# Altium PCB 盲文32.pcbdoc
Units mil, origin at the board's own origin, x right, y up, seen from the top; angles counter-clockwise.
Board outline 2210.03 x 1825.03 mil, 2 copper layers (Top Layer, Bottom Layer); 76 components, 76 nets, 285 pads, 45 vias.
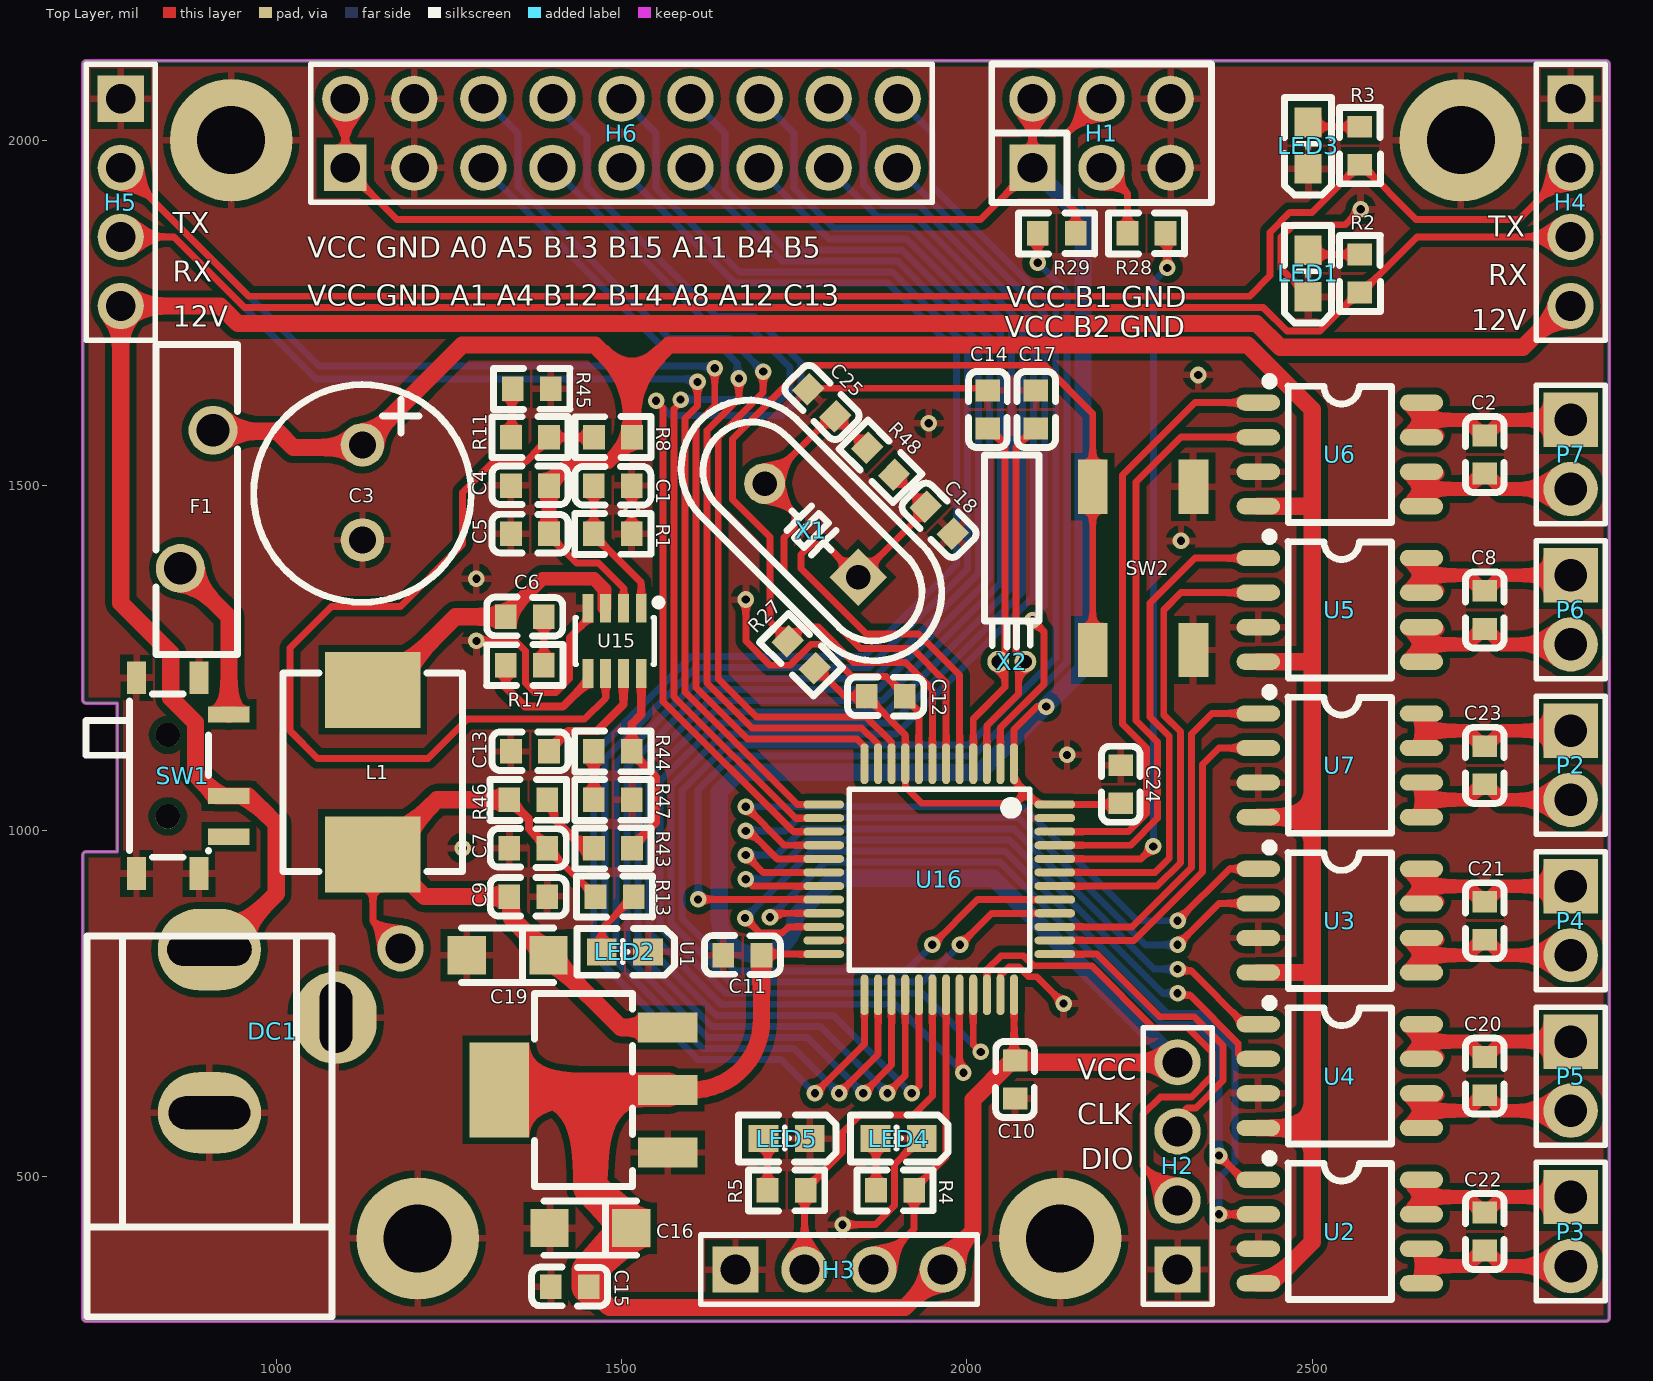
[diagram p0: Top Layer view]
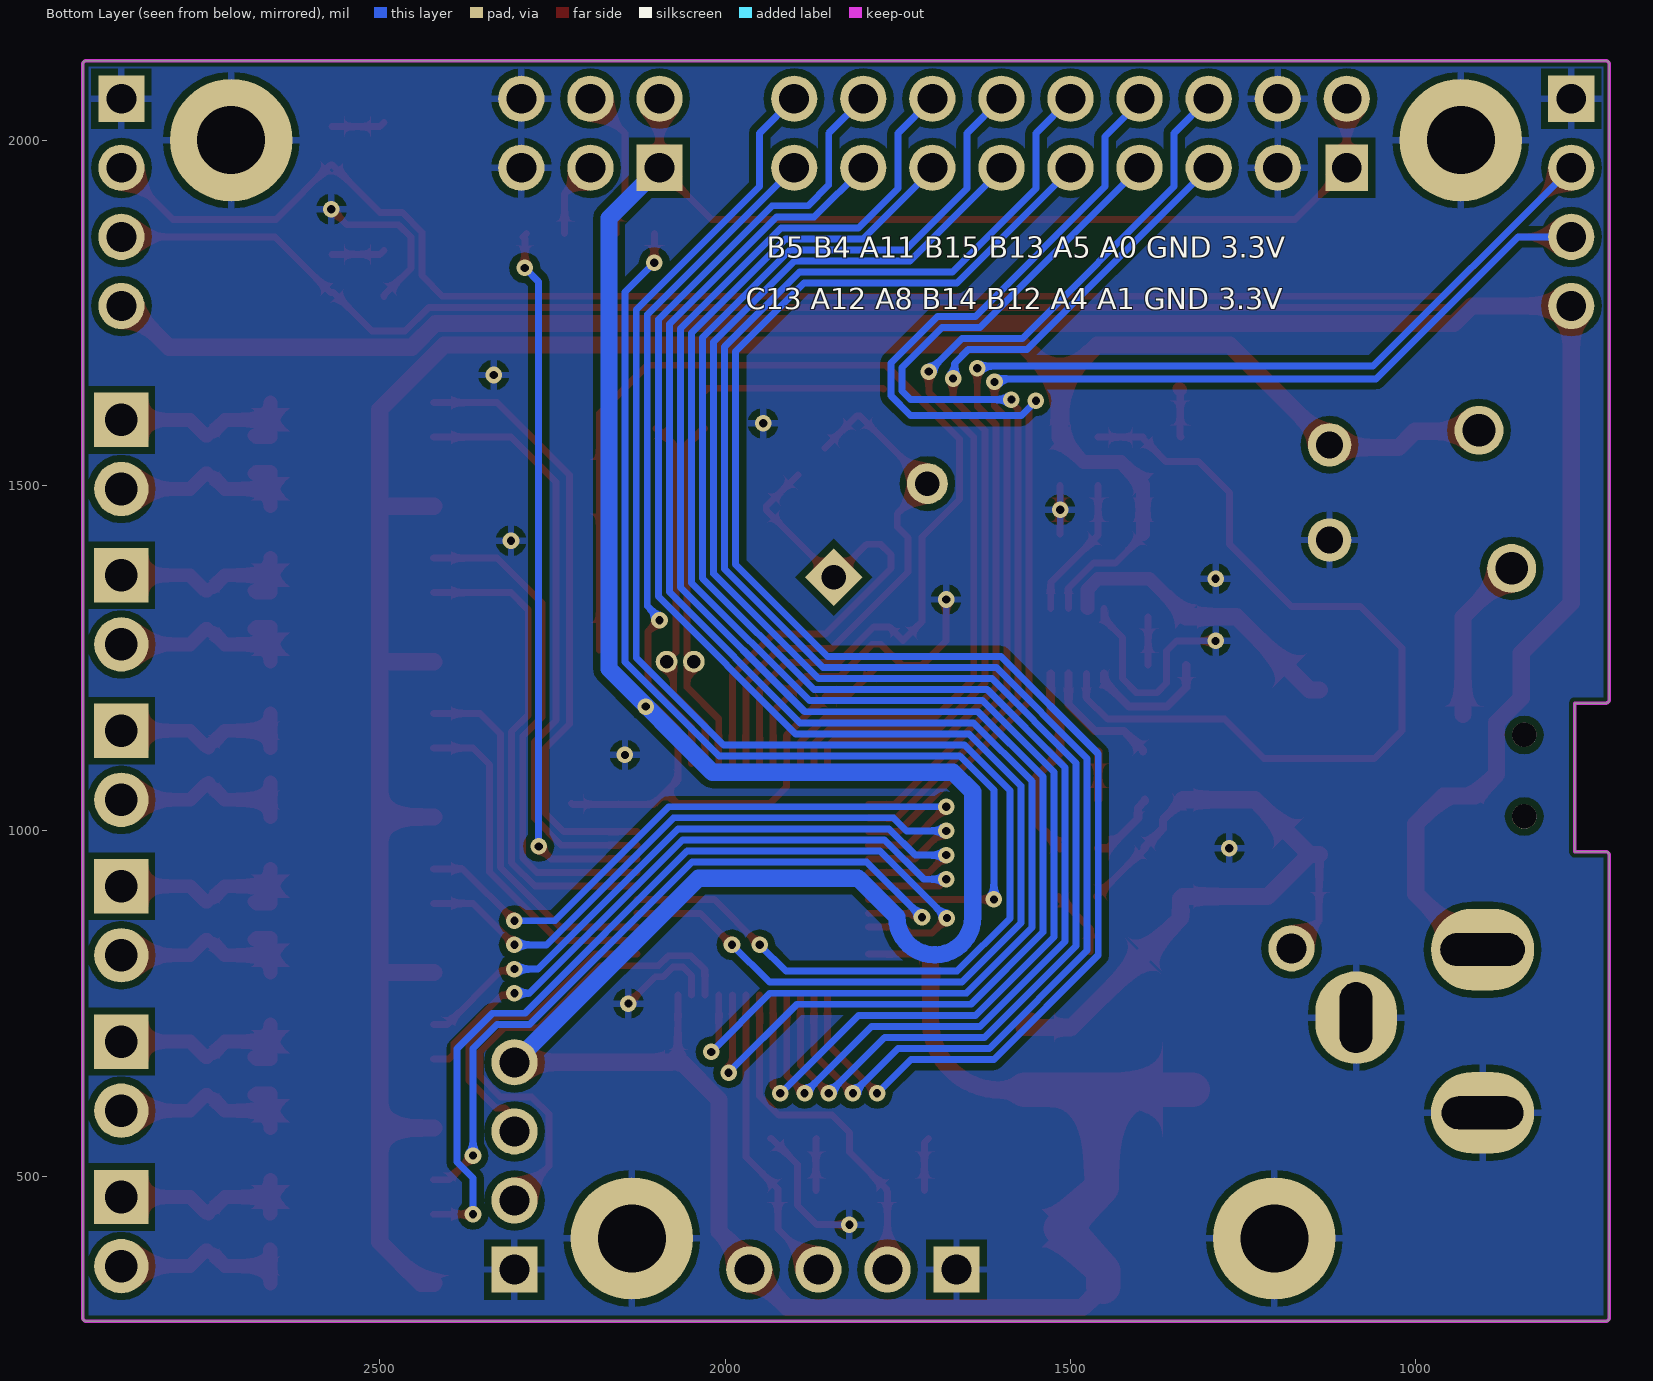
[diagram p1: Bottom Layer view, seen from below]

## Layer stack, top to bottom
Top Solder: solder mask 0.4, Solder Resist, Dk 3.5
Top Layer: signal copper 1.4
Dielectric1: dielectric 12.6, FR-4, Dk 4.8
Bottom Layer: signal copper 1.4
Bottom Solder: solder mask 0.4, Solder Resist, Dk 3.5

## Board outline
719.99,295 719.99,964.97 cw(c725,965) 725,970.01 769.99,970.01 769.99,1184.98 725,1184.98 ccw(c725,1190) 725,1184.98 ccw(c725,1190) 725,1184.98 cw(c725,1190) 719.98,1190 719.98,2110 cw(c725,2110) 725,2115.01 2925,2115.01 cw(c2925,2110) 2930.01,2110 2930.01,295 cw(c2925,295) 2925,289.99 725,289.99 cw(c725,295)

## Design rules (kind name [scope] priority, off if disabled: settings)
Clearance keepoutlayer [(InLayerClass('Signal Layers')) vs OnLayer('Keep-Out Layer')] p1: gap=6 ignorepadtopadclearanceinfootprint=FALSE
Clearance polygon [All vs InPolygon] p2: gap=10 ignorepadtopadclearanceinfootprint=FALSE
Clearance [All] p3: gap=6 ignorepadtopadclearanceinfootprint=FALSE except(0: Arc-Text Arc-Hole Track-Text Track-Hole SMDPad-Text SMDPad-Hole THPad-Text THPad-Hole Via-Text Via-Hole Fill-Text Fill-Hole Poly-Text Poly-Hole Region-Text Region-Hole Text-Text Text-Hole)
ComponentClearance [All] p1 off: gap=10 collisioncheckmode=3 verticalgap=10 showdistances=FALSE
DiffPairsRouting DiffPair_DiffPairsRouting [All] p1: maxlimit=10 minlimit=10 mostfreqgap=10 toplayer_minwidth=15 toplayer_maxwidth=15 toplayer_prefwidth=15 bottomlayer_minwidth=15 bottomlayer_maxwidth=15 bottomlayer_prefwidth=15 maxuncoupledlength=500
DiffPairsRouting [All] p2: maxlimit=10 minlimit=10 mostfreqgap=10 toplayer_minwidth=15 toplayer_maxwidth=15 toplayer_prefwidth=15 bottomlayer_minwidth=15 bottomlayer_maxwidth=15 bottomlayer_prefwidth=15 maxuncoupledlength=500
HoleSize [All] p1: absolutevalues=TRUE maxlimit=99999 minlimit=11.81 maxpercent=80.000 minpercent=20.000
HoleToHoleClearance [All] p1: gap=0 allowstackedmicrovias=TRUE
MinimumSolderMaskSliver [All] p1 off: minsoldermaskwidth=6
PolygonConnect [All] p1: connectstyle=Relief reliefconductorwidth=10 reliefentries=4 polygonreliefangle="90 Angle" airgapwidth=10
RoutingVias [All] p1: holewidth=12 width=24 viastyle="Through Hole" minholewidth=12 minwidth=24 maxholewidth=24 maxwidth=32
SilkToSilkClearance [All] p1: silktosilkclearance=0
SilkToSolderMaskClearance [IsPad] p1: minsilkscreentomaskgap=0 clearancetoexposedcopper=TRUE
SolderMaskExpansion [All] p1: expansion=4
Width gnd [InNet('GND')] p1: maxlimit=50 minlimit=10 preferedwidth=30
Width vcc [InNet('VCC')] p2: maxlimit=50 minlimit=10 preferedwidth=20
Width [All] p3: maxlimit=50 minlimit=6 preferedwidth=10
23 further rules are at their usual default settings.

## Components (designator, comment, footprint, x,y, rotation, side; value= is the part's Value field where it differs from the comment)
C1 "1nF" C0603 1487.44,1500 r180 top
C2 "100nF" C0603 2750,1545 r90 top
C3 "220uF" CAP-TH_BD8.0-P3.50-D1.0-FD 1125,1490 r270 top
C4 "4.7uF" C0603 1367.44,1500 r0 top
C5 "100nF" C0603 1367.44,1430 r0 top
C6 "100nF" C0603 1360,1310 r0 top
C7 "22uF" C0603 1365,975 r0 top
C8 "100nF" C0603 2750,1320 r90 top
C9 "100nF" C0603 1365,905 r180 top
C10 "100nF" C0603 2070,640 r90 top
C11 "100nF" C0603 1675,820 r0 top
C12 "100nF" C0603 1882.44,1195 r180 top
C13 "100nF" C0603 1367.44,1115 r0 top
C14 "10pF" C0603 2030,1610 r270 top
C15 "100nF" C0603 1425,340 r0 top
C16 "10uF" CAP-SMD_L3.2-W1.6-R-RD 1455,425 r0 top
C17 "10pF" C0603 2100,1610 r270 top
C18 "22pF" C0603 1960,1450 r135 top
C19 "10uF" CAP-SMD_L3.2-W1.6-R-RD 1335,820 r0 top
C20 "100nF" C0603 2750,645 r90 top
C21 "100nF" C0603 2750,870 r90 top
C22 "100nF" C0603 2750,420 r90 top
C23 "100nF" C0603 2750,1095 r90 top
C24 "100nF" C0603 2222.44,1067.56 r270 top
C25 "22pF" C0603 1790,1620 r315 top
DC1 "DC-5.5*2.1" DC5.5*2.1MM 995,710 r180 top
F1 "A30-300" FUSE-TH_11.4-W3.0-P5.10-D0.8-S1.20 885,1480 r90 top
H1 "2271729-6" HDR-TH_6P-P2.54-V-M-R2-C3-S2.54 2195,2010 r0 top
H2 "Header-Male-2.54_1x4" HDR-TH_4P-P2.54-V 2305,515 r90 top
H3 "Header-Male-2.54_1x4" HDR-TH_4P-P2.54-V 1815,365 r0 top
H4 "Header-Male-2.54_1x4" HDR-TH_4P-P2.54-V 2874.02,1910 r270 top
H5 "Header-Male-2.54_1x4" HDR-TH_4P-P2.54-V 775,1910 r270 top
H6 "Header-Female-2.54_2x9" HDR-TH_18P-P2.54-V-R2-C9-S2.54 1500,2010 r0 top
L1 "10uH" IND-SMD_L7.3-W6.6_MHCI06030 1140,1085 r90 top
LED1 "19-217/GHC-YR1S2/3T" LED0603-R-RD 2494,1807 r90 top
LED2 "19-217/GHC-YR1S2/3T" LED0603-R-RD 1505,825 r180 top
LED3 "19-217/GHC-YR1S2/3T" LED0603-R-RD 2494,1992 r90 top
LED4 "19-217/GHC-YR1S2/3T" LED0603-R-RD 1901.1,554.69 r180 top
LED5 "19-217/GHC-YR1S2/3T" LED0603-R-RD 1739.1,554.69 r180 top
P2 "Header" HDR-TH_2P-P2.54-V-M 2874.02,1095 r270 top
P3 "Header" HDR-TH_2P-P2.54-V-M 2874.02,420 r270 top
P4 "Header" HDR-TH_2P-P2.54-V-M 2874.02,870 r270 top
P5 "Header" HDR-TH_2P-P2.54-V-M 2874.02,645 r270 top
P6 "Header" HDR-TH_2P-P2.54-V-M 2874.02,1320 r270 top
P7 "Header" HDR-TH_2P-P2.54-V-M 2874.02,1545 r270 top
R1 "47K" R0603 1487.44,1430 r180 top
R2 "3.6K" R0603 2569,1807 r90 top
R3 "3.6K" R0603 2569,1992 r90 top
R4 "3.6K" R0603 1896.1,479.69 r180 top
R5 "3.6K" R0603 1739.1,479.69 r180 top
R8 "100K" R0603 1487.56,1570 r0 top
R11 "20K" R0603 1367.56,1570 r0 top
R13 "3.6K" R0603 1490,905 r0 top
R17 "20" R0603 1360,1240 r0 top
R27 "10K" R0603 1760,1255 r135 top
R28 "10K" R0603 2260,1865 r0 top
R29 "10K" R0603 2130,1865 r0 top
R43 "220K" R0603 1487.56,975 r180 top
R44 "43K" R0603 1487.44,1115 r0 top
R45 "1K" R0603 1370,1640 r180 top
R46 "12K" R0603 1365,1045 r180 top
R47 "1.2K" R0603 1487.44,1045 r180 top
R48 "1M" R0603 1875,1535 r135 top
SW1 "MSK12C02" SW-TH_MSK12C02 864.76,1080 r270 top
SW2 "SKQGADE010" SW-SMD_4P-L5.2-W5.2-P3.70-LS6.4 2255,1380 r90 top
U1 "AMS1117-3.3" SOT-223-3_L6.5-W3.4-P2.30-LS7.0-BR 1445,625 r0 top
U2 "RZ7889" SOP-8_L4.9-W3.9-P1.27-LS6.0-BL 2540,420 r270 top
U3 "RZ7889" SOP-8_L4.9-W3.9-P1.27-LS6.0-BL 2540,870 r270 top
U4 "RZ7889" SOP-8_L4.9-W3.9-P1.27-LS6.0-BL 2540,645 r270 top
U5 "RZ7889" SOP-8_L4.9-W3.9-P1.27-LS6.0-BL 2540,1320 r270 top
U6 "RZ7889" SOP-8_L4.9-W3.9-P1.27-LS6.0-BL 2540,1545 r270 top
U7 "RZ7889" SOP-8_L4.9-W3.9-P1.27-LS6.0-BL 2540,1095 r270 top
U15 "MP2135" SOT-23-8_L3.0-W1.7-P0.65-LS2.8-BL 1490,1275 r180 top
U16 "STM32F103C8T6" LQFP-48_L7.0-W7.0-P0.50-LS9.0-BL 1960,930 r180 top
X1 "8MHz" HC-49US_L11.5-W4.5-P4.88 1775,1435 r135 top
X2 "32.768KHz" OSC-TH_BD2.0-P0.70-D0.3 2065,1245 r270 top

## Footprints (in the part's own frame and the unit in brackets; to place one, negate y for a bottom-side part, rotate by r counter-clockwise, add the part's x,y. Pads: shape width x height; smd on the part's side, far side on the other; paste and mask are expansions set on the pad)
C0603 [mm]
  rect 0.8x0.9 smd: 1(-0.7,0) 2(0.7,0)
  silkscreen extent -1.4,-0.7 1.4,0.72
CAP-SMD_L3.2-W1.6-R-RD [mm]
  rect 1.4x1.4 smd: 1(1.5,0) 2(-1.5,0)
  silkscreen extent -1.7,-1 1.7,1
CAP-TH_BD8.0-P3.50-D1.0-FD [mm]
  round 1.6 hole 1: 1(-1.75,0) 2(1.75,0)
  silkscreen extent -3.96,-4 4.04,4
DC5.5*2.1MM [mm]
  oval 3.8x3 hole 1.2 slot 3.1 at 0 deg copper offset 0.001,0: 1(2.325,-3.001)
  oval 3.8x3 hole 1.2 slot 3 at 0 deg: 2(2.325,2.999)
  oval 3x3.4 hole 1.2 slot 2.6 at 90 deg copper offset -0.001,0: 3(-2.325,-0.5)
  silkscreen extent -2.17,-3.5 6.83,10.5
FUSE-TH_11.4-W3.0-P5.10-D0.8-S1.20 [mm]
  round 1.8 hole 1.2: 1(-2.54,0.6) 2(2.54,-0.6)
  silkscreen extent -5.7,-1.5 5.7,1.5
HC-49US_L11.5-W4.5-P4.88 [mm]
  rect 1.5x1.5 hole 0.9: 1(-2.438,0)
  round 1.5 hole 0.9: 2(2.438,0)
  silkscreen extent -5.74,-2.5 5.74,2.5
HDR-TH_2P-P2.54-V-M [mm]
  rect 2x2 hole 1.2: 1(-1.27,0)
  round 2 hole 1.2: 2(1.27,0)
  silkscreen extent -2.54,-1.27 2.54,1.27
HDR-TH_4P-P2.54-V [mm]
  rect 1.7x1.7 hole 1.1: 1(-3.81,0)
  round 1.7 hole 1.1: 2(-1.27,0) 3(1.27,0) 4(3.81,0)
  silkscreen extent -5.08,-1.27 5.08,1.27
HDR-TH_6P-P2.54-V-M-R2-C3-S2.54 [mm]
  rect 1.7x1.7 hole 1.1: 1(-2.54,-1.27)
  round 1.7 hole 1.1: 2(-2.54,1.27) 3(0,-1.27) 4(0,1.27) 5(2.54,-1.27) 6(2.54,1.27)
  silkscreen extent -4.04,-2.54 4.04,2.54
HDR-TH_18P-P2.54-V-R2-C9-S2.54 [mm]
  rect 1.575x1.7 hole 1.1: 1(-10.16,-1.27)
  round 1.7 hole 1.1: 2(-10.16,1.27) 3(-7.62,-1.27) 4(-7.62,1.27) 5(-5.08,-1.27) 6(-5.08,1.27) 7(-2.54,-1.27) 8(-2.54,1.27) 9(0,-1.27) 10(0,1.27) 11(2.54,-1.27) 12(2.54,1.27) 13(5.08,-1.27) 14(5.08,1.27) 15(7.62,-1.27) 16(7.62,1.27) 17(10.16,-1.27) 18(10.16,1.27)
  silkscreen extent -11.43,-2.54 11.43,2.54
IND-SMD_L7.3-W6.6_MHCI06030 [mm]
  rect 2.8x3.5 smd: 1(-3.025,0) 2(3.025,0)
  silkscreen extent -3.65,-3.3 3.65,3.3
LED0603-R-RD [mil]
  rect 43x39 smd: 1(33.5,0) 2(-33.5,0)
  silkscreen extent -72,-34 70,34
LQFP-48_L7.0-W7.0-P0.50-LS9.0-BL [mm]
  oval 0.3x1.5 smd: 1(-2.75,-4.25) 2(-2.25,-4.25) 3(-1.75,-4.25) 4(-1.25,-4.25) 5(-0.75,-4.25) 6(-0.25,-4.25) 7(0.25,-4.25) 8(0.75,-4.25) 9(1.25,-4.25) 10(1.75,-4.25) 11(2.25,-4.25) 12(2.75,-4.25) 25(2.75,4.25) 26(2.25,4.25) 27(1.75,4.25) 28(1.25,4.25) 29(0.75,4.25) 30(0.25,4.25) 31(-0.25,4.25) 32(-0.75,4.25) 33(-1.25,4.25) 34(-1.75,4.25) 35(-2.25,4.25) 36(-2.75,4.25)
  oval 1.5x0.3 smd: 13(4.25,-2.75) 14(4.25,-2.25) 15(4.25,-1.75) 16(4.25,-1.25) 17(4.25,-0.75) 18(4.25,-0.25) 19(4.25,0.25) 20(4.25,0.75) 21(4.25,1.25) 22(4.25,1.75) 23(4.25,2.25) 24(4.25,2.75) 37(-4.25,2.75) 38(-4.25,2.25) 39(-4.25,1.75) 40(-4.25,1.25) 41(-4.25,0.75) 42(-4.25,0.25) 43(-4.25,-0.25) 44(-4.25,-0.75) 45(-4.25,-1.25) 46(-4.25,-1.75) 47(-4.25,-2.25) 48(-4.25,-2.75)
  silkscreen extent -3.33,-3.31 3.3,3.34
OSC-TH_BD2.0-P0.70-D0.3 [mm]
  round 0.8 hole 0.5: 1(0,0.5) 2(0,-0.5)
  silkscreen extent -7.6,-1 -0.54,1
R0603 [mm]
  rect 0.8x0.9 smd: 1(-0.7,0) 2(0.7,0)
  silkscreen extent -1.4,-0.75 1.4,0.76
SOP-8_L4.9-W3.9-P1.27-LS6.0-BL [mm]
  oval 0.6x1.598 smd: 1(-1.905,-3) 2(-0.635,-3) 3(0.635,-3) 4(1.905,-3) 5(1.905,3) 6(0.635,3) 7(-0.635,3) 8(-1.905,3)
  silkscreen extent -2.84,-2.74 2.5,1.9
SOT-23-8_L3.0-W1.7-P0.65-LS2.8-BL [mm]
  rect 0.4x1.06 smd: 1(-0.98,-1.2) 2(-0.33,-1.2) 3(0.33,-1.2) 4(0.98,-1.2) 5(0.98,1.2) 6(0.33,1.2) 7(-0.33,1.2) 8(-0.98,1.2)
  silkscreen extent -1.74,-1.54 1.45,0.85
SOT-223-3_L6.5-W3.4-P2.30-LS7.0-BR [mm]
  rect 2.2x1.1 smd: 1(3.099,-2.3) 2(3.099,0) 3(3.099,2.3)
  rect 2.2x3.5 smd: 4(-3.099,0)
  silkscreen extent -1.8,-3.55 1.8,3.55
SW-SMD_4P-L5.2-W5.2-P3.70-LS6.4 [mm]
  rect 2x1.1 smd: 1(-3,1.85) 2(3,1.85) 3(-3,-1.85) 4(3,-1.85)
SW-TH_MSK12C02 [mm]
  rect 0.6x1.524 smd: 1(-2.25,1.7) 2(0.75,1.7) 3(2.25,1.7)
  rect 1.2x0.7 smd: 4(-3.6,-1.7) 4(-3.6,0.6) 4(3.6,-1.7) 4(3.6,0.6)
  round 0.9 hole 0.9 unplated: ""(-1.5,-0.55) ""(1.5,-0.55)
  silkscreen extent -3,-3.55 3,0.95

## Free pads (board coordinates)
  round 177.17 hole 98.43: 2(935,2000) 2(1205,410) 2(2135,410) 2(2715,2000)
  round 66.93 hole 43.31: 3(1180,830)

## Via types
v1: diameter 24, hole 12, Top Layer to Bottom Layer, 45 vias

## Nets (pads, with @x,y where several pads share a name; then routed paths per layer and width w, separated by ;. In a path a pad name is that pad's centre, name@x,y a point inside that pad or via, vN(x,y) a via of type N, cw(c..) or ccw(c..) an arc to the next point about the centre after c; other vN are vias at no path point)
3.3V: C10.2 C11.2 C12.2 C15.2 C16.1 C24.2 H1.1 H1.2 H2.4 H3.4 H6.1 H6.2 R27.1 U1.2 U1.4 U16.1 U16.9 U16.24 U16.36 U16.48 | length 6580
  Top Layer w10: H6.2 H6.1 1100,1957.54 1126,1931.54 1128.46,1931.54 1175,1885 2020,1885 H1.1 H1.2 ; C11.2 1704.29,821.74 U16.24 ; R27.1@1781.32,1236.47 1822.79,1195 C12.2 1854.88,1193.03 1865.63,1182.28 1867.6,1182.28 1910.79,1139.1 U16.9 1911.13,1096.98 1911.13,1063.87 1935,1040 2070,1040 2085.98,1055.98 ; C10.2@2068.26,674.29 U16.36 ; v1(2115,1180) 2101.74,1180 2068.27,1146.53 2068.27,1104.16 U16.1 2068.27,1073.7 2085.98,1055.98 ; U16.48 2103.7,1038.27 2085.98,1055.98 ; U16.48 2220.71,1038.27 C24.2
  Top Layer w25: C15.2 1452.56,338.03 1455.81,334.78 1457.78,334.78 1482.56,310 1910,310 H3.4 1965,376.35 2008.82,420.17 2008.82,610.9 2062.23,664.31 2066.75,664.31 C10.2 ; U1.2 1602.56,625 ccw(c1602.56,725) 1610.3,625.3 ccw(c1602.56,725) 1702.26,717.26 ccw(c1602.56,725) 1702.56,724.55 ccw(c1602.56,725) 1702.56,725 C11.2 ; C10.2@2068.26,674.29 2077.56,665 H2.4
  Top Layer w50: U1.4 1455,625 ; C15.2 1452.56,363.5 C16.1 1455,484.06 1455,625 ; U1.2 1455,625
  Bottom Layer w25: H1.1 2168.19,1886.81 2168.19,1234.81 2018.38,1085 1670,1085 1641.5,1056.5 1641.5,875.54 ccw(c1696.5,875.54) 1696.5,820.54 ccw(c1696.5,875.54) 1751.5,875.54 1807.46,931.5 2038.5,931.5 H2.4
5V: C7.2 C9.2 C19.1 L1.1 pad.3 R13.1 R46.2 U1.3 | length 1122
  Top Layer w10: L1.1 1140,870 pad.3 ; C7.2 1392.56,973.03 1403.31,962.28 1405.16,962.28 R13.1
  Top Layer w12: R46.2 1366.22,1016.22 1366.22,1003.31 1392.56,976.97 C7.2
  Top Layer w25: L1.1 L1.1@1153.78,965.9 ; R46.2 1232.88,1045 L1.1@1153.78,965.9 ; U1.3@1557.85,724.7 U1.3 1498.5,715.55 1409.12,804.94 C19.1 1340.69,873.37 1340.69,901.75 C9.2 1214.68,905 L1.1@1153.78,965.9
12: F1.1 SW1.1 | length 240.5
  Top Layer w25: F1.1 931.69,1309.69 SW1.1
12V: DC1.1 H4.4 H5.4 SW1.2 | length 3249.1
  Top Layer w25: DC1.1 919.16,828.13 1000,908.97 1000,1010 959.53,1050.47 SW1.2 914.88,1050.47 883.19,1082.16 883.19,1156.81 847.5,1192.5 847.5,1257.5 775,1330 H5.4 919.14,1760 944.64,1734.5 2419.34,1734.5 2453.84,1700 2805,1700 2865,1760 H4.4
BOOT0: R28.2 U16.44 | length 1049
  Top Layer w10: U16.44 2252.03,959.53 v1(2270,977.5) ; R28.2 2292.56,1860 2290,1857.44 v1(2290,1815)
  Bottom Layer w10: v1(2270,977.5) 2270,1795 v1(2290,1815)
BOOT1: R29.1 U16.20 | length 1588.9
  Top Layer w10: v1(1610.82,900.82) 1792.33,900.82 U16.20 ; v1(2102.44,1822.56) R29.1
  Bottom Layer w10: v1(1610.82,900.82) 1610.82,1059.06 1660.27,1108.5 2008.64,1108.5 2144.69,1244.54 2144.69,1780.31 v1(2102.44,1822.56)
EX_IN: C17.2 U16.3 X2.1 | length 527.1
  Top Layer w10: U16.3 2028.9,1152.42 2075,1198.52 2075,1235.31 X2.1 2071,1258.69 2071,1555.41 2098.03,1582.44 C17.2
EX_OUT: C14.2 U16.4 X2.2 | length 523.6
  Top Layer w10: U16.4 2009.22,1162.25 2055,1208.04 2055,1235.32 X2.2 2055,1254.68 2055,1559.41 2031.97,1582.44 C14.2
F1_2: C3.1 C4.2 C5.2 F1.2 R8.2 U2.4 U3.4 U4.4 U5.4 U6.4 U7.4 U15.2 | length 3931.8
  Top Layer w10: C5.2 1395,1428.03 1435.17,1387.86 1466.87,1387.86 1502.99,1351.73 U15.2
  Top Layer w20: C5.2 C4.2 1395,1501.97 1427.03,1534 1481.08,1534 1515.12,1568.03 R8.2
  Top Layer w25: F1.2 910.18,1578.44 1001.55,1578.44 1025,1555 1121.1,1555 C3.1 1269.6,1703.5 1461.5,1703.5 1515.12,1649.88 ; F1.2@908.62,1600 F1.2@921.03,1600 ; R8.2 1515.12,1649.88 ; U2.4 2440.16,345 2500,404.84 2500,570 ; U4.4 2500,570 ; U3.4 2495,795 2500,790 ; U7.4 2500,1020 ; U5.4 2500,1245 ; U6.4 2500,1470 ; 1515.12,1649.88 1568.73,1703.5 2406.5,1703.5 2500,1610 2500,1470 ; 2500,570 2500,790 ; 2500,790 2500,1020 ; 2500,1020 2500,1245 ; 2500,1245 2500,1470
GND: C1.1 C3.2 C4.1 C5.1 C7.1 C9.1 C10.1 C11.1 C12.1 C13.1 C14.1 C15.1 C16.2 C17.1 C18.1 C19.2 C24.1 C25.1 DC1.2 DC1.3 H1.5 H1.6 H2.1 H3.1 H4.1 H5.1 H6.3 H6.4 LED1.2 LED2.2 LED3.2 LED4.2 LED5.2 pad.2 R1.1 R45.1 R47.1 SW1.4 SW2.3 SW2.4 U1.1 U2.3 U3.3 U4.3 U5.3 U6.3 U7.3 U15.4 U16.8 U16.23 U16.35 U16.47 | length 1685.6
  Top Layer w10: v1(1290,1275) 1346.47,1275 1360.81,1260.66 1360.81,1214.19 1375,1200 1404.47,1200 1425,1220.53 1425,1280 1451.41,1306.41 U15.4 ; R1.1 v1(1515,1465) C1.1 ; v1(1680,1335) 1680,1275 1715.17,1239.83 1743.68,1239.83 1774.03,1270.18 1787.19,1270.18 1833.66,1223.72 1883.25,1223.72 1910,1196.97 C12.1 1910,1193.03 1930.47,1172.55 U16.8 ; C25.1 1771.91,1640.88 2026.68,1640.88 C14.1 C14.1@2028.03,1637.56 ; v1(1820,430) 1867.87,430 1895.28,457.41 1895.28,517.37 1932.6,554.69 LED4.2 ; U16.35 2048.93,763.02 2048.93,790.87 2061.26,803.21 2075.27,803.21 2089.65,788.82 2101.18,788.82 v1(2140,750) ; LED1.2 2494,1775.5 2455,1814.5 2455,1860 2472.5,1877.5 2547.5,1877.5 v1(2570,1900)
  other v1: 1270,975 2145,1110 1290,1365 2310,1420 1945,1590 2335,1660
IN1: U7.2 U16.38 | length 501
  Top Layer w10: U16.38 2241.82,841.41 2341,940.59 2341,1096 2365,1120 U7.2
IN2: U7.1 U16.39 | length 535.4
  Top Layer w10: U16.39 2238.88,861.1 2325,947.22 2325,1140 2355,1170 U7.1
IN3: U2.1 U16.21 | length 1101.9
  Top Layer w10: v1(1715,875) 1718.79,875 1724.58,880.79 U16.21 ; U16.21@1792.33,880.44 U16.21 ; v1(2365,530) 2400,495 U2.1
  Bottom Layer w10: v1(1715,875) 1795,955 2048.23,955 2283.23,720 2330,720 2365,685 v1(2365,530)
IN4: U2.2 U16.22 | length 1300.7
  Top Layer w10: v1(1678.84,873.84) 1700.68,852 1732.47,852 1741.57,861.11 U16.22 ; v1(2365,445) U2.2
  Bottom Layer w10: v1(1678.84,873.84) 1776,971 2054.86,971 2289.86,736 2336.63,736 2388,684.63 2388,520.47 2365,497.47 v1(2365,445)
IN5: U3.1 U16.16 | length 977.1
  Top Layer w10: v1(1680,1035) 1735.79,979.21 U16.16 ; v1(2305,870) 2380,945 U3.1
  Bottom Layer w10: v1(1680,1035) 2081.37,1035 2246.37,870 v1(2305,870)
IN6: U3.2 U16.17 | length 980.3
  Top Layer w10: v1(1680,1000) 1685,1000 1725.47,959.53 U16.17 ; v1(2305,835) 2365,895 U3.2
  Bottom Layer w10: v1(1680,1000) 1737.12,1000 1756.12,1019 2074.74,1019 2258.74,835 v1(2305,835)
IN7: U4.1 U16.18 | length 997.9
  Top Layer w10: v1(1680,965) 1705.16,939.84 U16.18 ; v1(2305,800) 2307.68,797.32 2324.92,797.32 2402.25,720 U4.1
  Bottom Layer w10: v1(1680,965) 1724.75,965 1762.75,1003 2068.12,1003 2271.12,800 v1(2305,800)
IN8: U4.2 U16.19 | length 1022.3
  Top Layer w10: v1(1680,930) 1689.84,920.16 U16.19 ; v1(2305,765) 2307.68,762.32 2322.68,762.32 2392.8,692.2 2392.8,677.2 2400,670 U4.2
  Bottom Layer w10: v1(1680,930) 1712.37,930 1769.37,987 2061.49,987 2283.49,765 v1(2305,765)
IN9: U5.2 U16.42 | length 719
  Top Layer w10: U16.42 2275.31,920.15 2309,953.85 2309,1143.63 2285,1167.63 2285,1320 2310,1345 U5.2
IN10: U5.1 U16.43 | length 739.2
  Top Layer w10: U16.43 2272.37,939.84 2293,960.47 2293,1137 2265,1165 2265,1330 2330,1395 U5.1
IN11: U6.2 U16.45 | length 868.2
  Top Layer w10: U16.45 2236.84,979.21 2276,1018.37 2276,1129 2245,1160 2245,1505 2310,1570 U6.2
IN12: U6.1 U16.46 | length 888.4
  Top Layer w10: U16.46 2233.9,998.9 2260,1025 2260,1120 2225,1155 2225,1515 2330,1620 U6.1
LED2_1: LED2.1 R13.2 | length 100.2
  Top Layer w10: LED2.1 1471.5,858.94 1504.84,892.28 1506.81,892.28 1517.56,903.03 R13.2
LED4_1: LED4.1 R4.2 | length 75.4
  Top Layer w10: LED4.1 1868.54,553.75 R4.2
LED5_1: LED5.1 R5.2 | length 77.5
  Top Layer w10: LED5.1 1711.54,548.75 R5.2
OSC_IN: C18.2 R48.1 U16.5 X1.1 | length 758.5
  Top Layer w10: R48.1 C18.2 1940.51,1464.75 X1.1 1795,1415 1775,1415 1760,1400 1760,1380 1855,1285 1930,1285 1989.53,1225.47 U16.5
OSC_OUT: C25.2 R48.2 U16.6 X1.2 | length 779.4
  Top Layer w10: R48.2 C25.2 1804.75,1600.51 X1.2 1750.86,1459.14 1750.86,1440.86 1735,1425 1735,1375 1846,1264 1921,1264 1969.84,1215.16 U16.6
OUT1: C23.2 P2.1 U7.7 U7.8 | length 287.1
  Top Layer w20: U7.7 2658.11,1145 ; U7.8 2658.11,1145 ; P2.1 2774.41,1145 2751.97,1122.56 C23.2 2748.14,1120.69 2748.14,1122.45 2742.28,1128.31 2740.52,1128.31 2723.83,1145 2658.11,1145
OUT2: C23.1 P2.2 U7.5 U7.6 | length 287.1
  Top Layer w20: U7.5 2658.11,1045 ; U7.6 2658.11,1045 ; P2.2 2774.42,1045 2751.97,1067.44 C23.1 2748.14,1069.31 2748.14,1067.55 2742.28,1061.7 2740.53,1061.7 2723.83,1045 2658.11,1045
OUT3: C22.2 P3.1 U2.7 U2.8 | length 274.9
  Top Layer w20: 2658.11,470 2723.83,470 C22.2@2740.52,453.31 ; U2.8 2658.11,446.39 U2.7@2658.8,445.69 ; C22.2@2748.14,445.69 C22.2 2751.97,447.56 2774.41,470 P3.1
OUT4: C22.1 P3.2 U2.5 U2.6 | length 272.2
  Top Layer w20: U2.5 2658.11,370 ; U2.6@2658.8,394.31 2658.11,393.61 2658.11,370 ; C22.1@2740.53,386.7 2723.83,370 2658.11,370 ; C22.1 2751.97,392.44 2774.42,370 P3.2
OUT5: C21.2 P4.1 U3.7 U3.8 | length 296.9
  Top Layer w20: 2658.11,920 2723.83,920 C21.2@2740.52,903.3 ; U3.8 U3.7 2678.73,895 U3.7@2681.29,897.56 ; C21.2 2751.97,897.56 2774.41,920 P4.1
OUT6: C21.1 P4.2 U3.5 U3.6 | length 296.9
  Top Layer w20: U3.5 U3.6 2678.73,845 U3.6@2681.29,842.44 ; 2658.11,820 2723.83,820 C21.1@2740.53,836.7 ; C21.1 2751.97,842.44 2774.42,820 P4.2
OUT7: C20.2 P5.1 U4.7 U4.8 | length 296.9
  Top Layer w20: 2658.11,695 2723.83,695 C20.2@2740.52,678.3 ; U4.8 U4.7 2678.73,670 U4.7@2681.29,672.56 ; C20.2 2751.97,672.56 2774.41,695 P5.1
OUT8: C20.1 P5.2 U4.5 U4.6 | length 296.9
  Top Layer w20: U4.5 U4.6 2678.73,620 U4.6@2681.29,617.44 ; 2658.11,595 2723.83,595 C20.1@2740.53,611.7 ; C20.1 2751.97,617.44 2774.42,595 P5.2
OUT9: C8.2 P6.1 U5.7 U5.8 | length 296.9
  Top Layer w20: 2658.11,1370 2723.83,1370 C8.2@2740.52,1353.31 ; U5.8 U5.7 2678.73,1345 U5.7@2681.29,1347.56 ; C8.2 2751.97,1347.56 2774.41,1370 P6.1
OUT10: C8.1 P6.2 U5.5 U5.6 | length 296.9
  Top Layer w20: U5.5 U5.6 2678.73,1295 U5.6@2681.29,1292.44 ; 2658.11,1270 2723.83,1270 C8.1@2740.53,1286.7 ; C8.1 2751.97,1292.44 2774.42,1270 P6.2
OUT11: C2.2 P7.1 U6.7 U6.8 | length 296.9
  Top Layer w20: 2658.11,1595 2723.83,1595 C2.2@2740.52,1578.31 ; U6.8 U6.7 2678.73,1570 U6.7@2681.29,1572.56 ; C2.2 2751.97,1572.56 2774.41,1595 P7.1
OUT12: C2.1 P7.2 U6.5 U6.6 | length 296.9
  Top Layer w20: U6.5 U6.6 2678.73,1520 U6.6@2681.29,1517.44 ; 2658.11,1495 2723.83,1495 C2.1@2740.53,1511.7 ; C2.1 2751.97,1517.44 2774.42,1495 P7.2
PA0: H6.6 U16.10 | length 1405.4
  Top Layer w10: v1(1705,1665) 1705,1634.42 1640,1569.42 1640,1220.66 1695.66,1165 1854.21,1165 1890.76,1128.45 1890.76,1097.67 U16.10
  Bottom Layer w10: H6.6 1350,2010 1350,1932.63 1569.63,1713 1657,1713 v1(1705,1665)
PA1: H6.5 U16.11 | length 1280.1
  Top Layer w10: v1(1670,1655) 1670,1626 1624,1580 1624,1214.04 1689.04,1149 1847.59,1149 1871.07,1125.51 1871.07,1097.67 U16.11
  Bottom Layer w10: H6.5 1563,1697 1648,1697 1667.32,1677.68 1667.32,1657.68 v1(1670,1655)
PA4: H6.7 U16.14 | length 1385.2
  Top Layer w10: v1(1585.54,1624.46) 1585.54,1620.67 1576,1611.14 1576,1194.15 1751.57,1018.58 U16.14
  Bottom Layer w10: H6.7 1631,1729 1686,1729 1744,1671 1744,1636.63 1731.83,1624.46 v1(1585.54,1624.46)
PA5: H6.8 U16.15 | length 1586.9
  Top Layer w10: v1(1550,1622.56) 1560,1612.56 1560,1187.53 1748.63,998.9 U16.15
  Bottom Layer w10: H6.8@1400,2055 1450,2005 1450,1932.63 1637.63,1745 1692.63,1745 1760,1677.63 1760,1630 1731.46,1601.46 1571.1,1601.46 v1(1550,1622.56)
PA8: H6.13 U16.29 | length 2324.9
  Top Layer w10: v1(1920,620) 1930.47,630.47 U16.29
  Bottom Layer w10: H6.13 1700,1957.37 1800.37,1857 1912.49,1857 2048.69,1720.8 2048.69,1359.1 1878.09,1188.5 1627.13,1188.5 1523.82,1085.19 1523.82,846.69 1637.47,733.04 1806.96,733.04 v1(1920,620)
PA11: H6.14 U16.32 | length 2442.5
  Top Layer w10: U16.32 1989.18,762.33 1989.18,659.61 1995,653.79 v1(1995,650)
  Bottom Layer w10: H6.14 1750,2010 1750,1930 1807,1873 1919.12,1873 2064.69,1727.43 2064.69,1352.47 1884.72,1172.5 1633.76,1172.5 1539.82,1078.57 1539.82,853.32 1644.1,749.04 1895.96,749.04 v1(1995,650)
PA12: H6.15 U16.33 | length 2238.7
  Top Layer w10: U16.33 2009.21,690.79 v1(2020,680)
  Bottom Layer w10: H6.15 1871,1889 1925.75,1889 2080.69,1734.06 2080.69,1345.84 1891.35,1156.5 1640.38,1156.5 1555.82,1071.94 1555.82,859.95 1650.73,765.04 1934.96,765.04 v1(2020,680)
PB4: H6.16 U16.40 | length 2343.7
  Top Layer w10: v1(1990,835) 2035.44,880.44 2126.97,880.44 U16.40
  Bottom Layer w10: H6.16 1850,2010 1850,1935 1880,1905 1932.37,1905 2096.69,1740.69 2096.69,1339.21 1897.97,1140.5 1647.01,1140.5 1571.82,1065.31 1571.82,866.57 1657.36,781.04 1936.04,781.04 v1(1990,835)
PB5: H6.18 U16.41 | length 2323.5
  Top Layer w10: v1(1950,835) 2015.47,900.47 U16.41
  Bottom Layer w10: H6.18 1950,2010 1950,1932.63 2128.69,1753.94 2128.69,1251.17 2002.02,1124.5 1653.64,1124.5 1587.82,1058.68 1587.82,873.2 1663.98,797.04 1912.04,797.04 v1(1950,835)
PB12: H6.9 U16.25 | length 2425.7
  Top Layer w10: v1(1780,620) 1851.73,691.73 U16.25
  Bottom Layer w10: H6.9@1510.89,1949.11 H6.9 1500,1957.37 1664.37,1793 1885.98,1793 1984.69,1694.29 1984.69,1385.61 1851.58,1252.5 1600.62,1252.5 1459.82,1111.7 1459.82,820.18 1610.96,669.04 1730.96,669.04 v1(1780,620)
PB13: H6.10 U16.26 | length 2525.7
  Top Layer w10: v1(1815,620) 1871.42,676.42 U16.26
  Bottom Layer w10: H6.10 1550,2010 1550,1930 1671,1809 1892.61,1809 2000.69,1700.92 2000.69,1378.98 1858.21,1236.5 1607.25,1236.5 1475.82,1105.07 1475.82,826.81 1617.59,685.04 1749.96,685.04 v1(1815,620)
PB14: H6.11 U16.27 | length 2367.6
  Top Layer w10: v1(1850,620) 1891.1,661.1 U16.27
  Bottom Layer w10: H6.11 1600,1957.37 1732.37,1825 1899.24,1825 2016.69,1707.55 2016.69,1372.35 1864.84,1220.5 1613.87,1220.5 1491.82,1098.45 1491.82,833.44 1624.22,701.04 1768.96,701.04 v1(1850,620)
PB15: H6.12 U16.28 | length 2483
  Top Layer w10: v1(1885,620) 1910.79,645.79 U16.28
  Bottom Layer w10: H6.12 1650,2010 1650,1930 1739,1841 1905.86,1841 2032.69,1714.18 2032.69,1365.72 1871.46,1204.5 1620.5,1204.5 1507.82,1091.82 1507.82,840.07 1630.85,717.04 1787.96,717.04 v1(1885,620)
PC13: H6.17 U16.2 | length 990.9
  Top Layer w10: U16.2 2048.58,1149.47 2111.44,1212.32 2111.44,1288.56 v1(2095,1305)
  Bottom Layer w10: H6.17 2112.69,1747.31 2112.69,1325.5 2095,1307.81 v1(2095,1305)
R2_2: LED1.1 R2.2 | length 77.5
  Top Layer w10: LED1.1 2499.94,1834.56 R2.2
R3_2: LED3.1 R3.2 | length 77.5
  Top Layer w10: LED3.1 2499.94,2019.56 R3.2
R11_1: R11.1 R45.2 | length 71
  Top Layer w10: R11.1 1341.22,1571.22 R45.2@1341.22,1638.78
  Top Layer w20: R45.2@1341.22,1638.78 R45.2
R17_2: C6.2 R17.2 | length 70
  Top Layer w10: R17.2 C6.2
R28_1: H1.3 R28.1 | length 110.5
  Top Layer w10: H1.3 2232.44,1922.56 R28.1
R29_2: H1.4 R29.2 | length 220.9
  Top Layer w10: R29.2 2157.56,1897.44 2145,1910 2145,2010 H1.4
R43_2: R43.2 R46.1 | length 106.7
  Top Layer w12: R46.1 1392.56,1043.03 1402.3,1033.28 1402.3,1017.7 1445,975 R43.2
R44_1: R44.1 R47.2 | length 70
  Top Layer w12: R47.2 R44.1
RESET: R27.2 SW2.1 SW2.2 U16.7 | length 1623.8
  Top Layer w10: U16.7 1950.16,1204.84 1911,1244 1836,1244 1785,1295 1761.9,1295 1742.35,1275.44 1715,1302.79 1715,1425.51 1660.51,1480 1660.51,1567.31 1767.35,1674.15 2112.43,1674.15 2182.16,1604.41 SW2.2 SW2.1
RXD: H3.3 R4.1 U16.31 | length 441.1
  Top Layer w10: H3.3 1923.65,423.65 R4.1 1923.65,481.66 1969.84,527.85 U16.31
S$8: 
S$68: 
SWCLK: H2.3 U16.37 | length 457.4
  Top Layer w10: U16.37 2188.27,821.73 2279,731 2329,731 2371,689 2371,638.37 2331.63,599 2319,599 2305,585 H2.3
SWDIO: H2.2 U16.34 | length 731.9
  Top Layer w10: U16.34 2029.24,763.02 2029.24,799.24 2049.21,819.21 2082.32,819.21 2096.7,804.82 2180.18,804.82 2270,715 2320,715 2355,680 2355,645 2325,615 2280,615 2255,590 2255,515 H2.2
TXD: H3.2 R5.1 U16.30 | length 519.8
  Top Layer w10: H3.2 1765,478.04 R5.1 1766.65,481.66 1820,535.01 1820,563.65 1845.04,588.69 1922.64,588.69 1950.15,616.2 U16.30
U2RX: H4.3 H5.3 R2.1 U16.13 | length 3858.7
  Top Layer w10: H5.3 852.37,1860 954.37,1758 2429.07,1758 2463.57,1723.5 2511.08,1723.5 2567.03,1779.44 R2.1 2570.97,1779.44 2651.52,1860 H4.3 ; v1(1610,1650) 1610,1615 1592,1597 1592,1200.78 1754.51,1038.27 U16.13
  Bottom Layer w10: H5.3 852.37,1860 1057.91,1654.46 1605.54,1654.46 v1(1610,1650)
U2TX: H4.2 H5.2 R3.1 U16.12 | length 4113.4
  Top Layer w10: H5.2 961,1774 2409,1774 2439,1804 2439,1866.63 2467.37,1895 2499.56,1895 R3.1 2570.97,1964.44 2650.42,1885 2799.02,1885 H4.2 ; v1(1635,1670) 1635,1615 1608,1588 1608,1207.41 1682.41,1133 1840.96,1133 1851.73,1122.23 U16.12
  Bottom Layer w10: H5.2 1062,1673 1632,1673 v1(1635,1670)
U15_1: C1.2 R1.2 U15.1 | length 206.2
  Top Layer w10: C1.2 R1.2 1459.88,1428.03 1528.59,1359.33 U15.1
U15_3: C6.1 L1.2 U15.3 | length 436.9
  Top Layer w20: C6.1 1332.44,1311.97 1385.48,1365 1460.03,1365 1475.29,1349.74 U15.3@1475.29,1322.24
  Top Layer w25: L1.2 1153.79,1204.08 1259.71,1310 C6.1
U15_5: R17.1 U15.5 | length 189.3
  Top Layer w12: R17.1 1332.44,1207.56 1360,1180 1415,1180 1451.41,1216.41 U15.5
U15_6: R8.1 R11.2 U15.6 | length 1276.8
  Top Layer w10: R8.1 R11.2 1395.12,1568.03 1362.09,1535 1315,1535 1270,1490 1270,1415 1180,1325 1080,1325 1020,1265 1020,1145 1060,1105 1220,1105 1276.72,1161.72 1446.72,1161.72 1477.01,1192.01 U15.6
U15_7: C13.2 U15.7 | length 182.1
  Top Layer w12: C13.2 1395,1116.97 1422.74,1144.72 1464.72,1144.72 1502.99,1182.99 U15.7
U15_8: R43.1 R44.2 U15.8 | length 287.3
  Top Layer w12: R43.1 1515.12,976.97 1550,1011.86 1550,1078.03 1515,1113.03 R44.2 1515,1155 1528.59,1168.59 U15.8
pads on no net: SW1. SW1.3

## Polygon pours and split planes (outlines as drawn)
GND on Top Layer "GND_L01_P000" (solid, remove dead copper, pour order 0): 665,2170 590,2095 590,270 2970,270 3025,215 3025,2160
GND on Bottom Layer "GND_L02_P002" (solid, remove dead copper, pour order 2): 610,2165 610,220 620,210 675,265 2980,265 2980,2085 3050,2155

## Keep-outs
Keep-Out Layer:
  lines w5: 725,1184.98 cw(c725,1190) 719.98,1190 719.98,2110 cw(c725,2110) 725,2115.01 2925,2115.01 cw(c2925,2110) 2930.01,2110 2930.01,295 cw(c2925,295) 2925,289.99 725,289.99 cw(c725,295) 719.99,295 719.99,964.97 cw(c725,965) 725,970.01 769.99,970.01 769.99,1184.98 725,1184.98 ; 725,1184.99 ccw(c725,1190) 725,1184.99 ; 725,1184.98 ccw(c725,1190) 725,1184.99 ; 725,1184.98 725,1184.98

## Silkscreen, mask and mechanical layers (free items; w line width, h text height)
Top Overlay:
  text "TX" at 850,1865 h30
  text "TX" at 2755,1860 h30
  text "VCC GND A0 A5 B13 B15 A11 B4 B5" at 1045,1830 h30
  text "RX" at 850,1795 h30
  text "RX" at 2755,1790 h30
  text "VCC GND A1 A4 B12 B14 A8 A12 C13" at 1045,1760 h30
  text "VCC B1 GND" at 2056.75,1758 h30
  text "12V" at 850,1730 h30
  text "12V" at 2730,1725 h30
  text "VCC B2 GND" at 2055,1715 h30
  text "VCC" at 2160,640 h30
  text "CLK" at 2160,575 h30
  text "DIO" at 2165,510 h30
Bottom Overlay:
  text "U2TX / U2RX / 12V" at 530,2095 h40
  text "B5 B4 A11 B15 B13 A5 A0 GND 3.3V" at 1940,1830 h30
  text "C13 A12 A8 B14 B12 A4 A1 GND 3.3V" at 1970,1755 h30
Mechanical 1:
  lines w10: 725,965 725,295 2925,295 2925,2110 725,2110 725,1190 ; 725,965 725,965 ; 725,965 775,965 775,1190 725,1190 ; 725,1190 725,1190